# Altium PCB Relia_6_Layer.PcbDoc (part 2 of 2)
Units mm, origin at the board's own origin, x right, y up, seen from the top; angles counter-clockwise.
Board outline 40 x 40 mm, 6 copper layers (Top Layer, GND1, POWER1, POWER2, GND2, Bottom Layer), stack 0.816 mm thick; 143 components, 99 nets, 541 pads, 0 vias.
Unrouted connection lines stored in the file: 382.
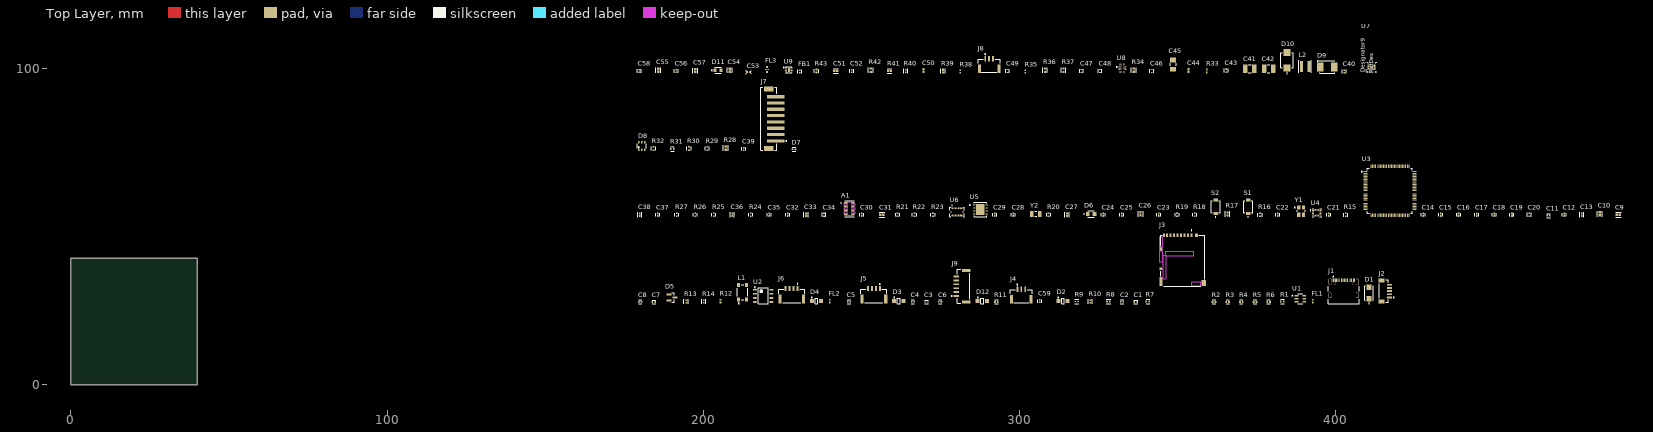
[diagram p0: Top Layer view]

## Part data (continued)
R40: library part CMP-04015-106274-1, "51.1kΩ ±1% 0.1W Chip Resistor 0402 Thick Film AEC-Q200 Qualified", Case Code (Imperial)=0402, Case Code (Metric)=1005, Max Operating Temperature=155°C, Min Operating Temperature=-55°C, Package Quantity=10000, Power Rating=63mW, Resistance=51.1kR, Resistor Type="Thick Film", Temperature Coefficient=100ppm/°C, Tolerance=1%, Voltage Rating=50V, Case/Package=0402, Construction=Rectangular, Depth=0.5mm, Height=0.35mm, Lead Free="Contains Lead", Length=1mm, Military Standard=Not, Packaging="Tape and Reel", RoHS Compliant=No, Series=RK73H, Termination=SMD/SMT, Voltage Rating (DC)=50V, Width=0.5mm
S1 S2: "Tactile Switch SPST-NO Top Actuated Surface Mount", Package=None, Availability=Unavailable, MP=TL1015AF160QG, Price=None
U1: "17V Clamp 5A (8/20Âµs) Ipp Tvs Diode Surface Mount SOT-23-6", Package="SOT-23-6 STMicroelectronics", Availability="In Stock", Check_prices=https://www.snapeda.com/parts/USBLC6-2SC6/STMicroelectronics/view-part/?ref=eda, MF=STMicroelectronics, MP=USBLC6-2SC6, Price=None, Purchase-URL=https://pricing.snapeda.com/search/part/USBLC6-2SC6/?ref=eda, SnapEDA_Link=https://www.snapeda.com/parts/USBLC6-2SC6/STMicroelectronics/view-part/?ref=snap
U2: library part CMP-2000-07245-1, "High-Speed CAN Transceiver, 3 to 5 V, 8-Pin SOIC (SOT96-1), RoHS, Tape and Reel", Manufacturer=NXP, Operating Supply Voltage (Max)=5.5V, Operating Supply Voltage (Min)=4.5V, Operating Supply Voltage (Typ)=5V, Operating Temperature (Max)=125C, Operating Temperature (Min)=-40C, Operating Temperature Classification=Automotive, Package Description="8-Pin Small Outline Integrated Circuit, Body 4.9 x 3.9 mm, Pitch 1.27 mm", Package Reference=SOT96-1, Package Type=SO, Power Down Mode=Normal/Silent, Supply Current=70mA, Category=Transceiver, Data Rate=1Mbps, Datasheet URL=http://www.nxp.com/documents/data_sheet/TJA1051.pdf, Datasheet Version="Rev. 7, 01/2015", DELETED=Compliant, Manufacturer URL=http://www.nxp.com/, Mounting=SurfaceMount, Mounting Technology=SurfaceMount, Number of Transceivers=1, Packaging=TapeandReel, Pin Count=8, Rad Hardened=No, Standard Supported=ISO11898-2
U3: library part CMP-12105-000050-1, "IC MCU 32BIT 2MB FLASH 100LQFP", Ambient Temperature Range High=+85°C, Ambient Temperature Range Low=-40°C, Frequency=480MHz, Manufacturer=STMicroelectronics, Max Junction Temp=+125°C, Max Supply Voltage=3.6V, Min Supply Voltage=1.71V, Package=LQFP100-1L, Temperature="-40°C to +125°C", Automotive=No, Category=IC, ComponentLink2Description=Datasheet, ComponentLink2URL=https://www.st.com/resource/en/datasheet/stm32h743vi.pdf, Core Architecture="Arm Cortex-M7", Data Bus Width=32bits, Device Class L1="Integrated Circuits (ICs)", Device Class L2="Embedded Processors and Controllers", Device Class L3=Microcontrollers, Digikey Description="IC MCU 32BIT 2MB FLASH 100LQFP", Height=1.6mm, Interface=I2C,SPI,UART,USART,USB,LIN,IrDA,Ethernet,I2S,Other, Ipc Land Pattern Name=QFP50P1600X1600X160-100, Lead Free=Yes, Manufacturer Part Number=STM32H743VIT6, Memory Size=2MBytes, Memory Type=FLASH, Number Of A/D Converters=3, Number Of Adc Channels=36, Number Of Cores=1, Number Of Ethernet Channels=1, Number Of I2C Channels=4, Number Of I/Os=82, Number Of Pwm Channels=42, Number Of Spi Channels=6, Number Of Timers/Counters=20, Number Of Uart Channels=9, Number Of Usb Channels=2, Octopart=https://octopart.com/stm32h743vit6-stmicroelectronics-76372527, Ram Size=1060KBytes, RoHS=TRUE, Standoff Height=0.05mm, Temperature Range High=+125°C, Temperature Range Low=-40°C
U4: "Accelerometer, Gyroscope, 6 Axis Sensor Output", Package=None, Availability=Unavailable, MP=ICM-42688-P, Price=None
U5: "FRAM (Ferroelectric RAM) Memory IC 256Kb (32K x 8) SPI 40 MHz 8-DFN (4x4.5)", Package="TDFN-8 Cypress Semiconductor", Check_prices=https://www.snapeda.com/parts/FM25V02A-DG/Infineon/view-part/?ref=eda, MF="Cypress Semiconductor", MP=FM25V02A-DG, SnapEDA_Link=https://www.snapeda.com/parts/FM25V02A-DG/Infineon/view-part/?ref=snap
U6: "High-performance 6-axis inertial sensor (accelerometer + gyroscope) <a href=\"https://pricing.snapeda.com/parts/BMI088/Bosch%20Sensortec/view-part?ref=eda\">Check prices</a>", Package=None, Availability=Unavailable, MP=BMI088, Price=None
U7: "SIMPLE SWITCHERÂ®, 36V 2.5A Synchronous Step-Down Converter 12-WSON -40 to 125", Manufacturer_Name="Texas Instruments", Copyright="Copyright (C) 2025 Ultra Librarian. All rights reserved.", Datasheet=https://www.ti.com/lit/gpn/lmr23625, Manufacturer_Part_Number=LMR23625CFPDRRR, RefDes=RefDes, TYPE=TYPE
U8: "2.7-V&nbsp;to 22-V, 56-mâ„", Package="VQFN-HR-12 Texas Instruments", Availability="In Stock", Check_prices=https://www.snapeda.com/parts/TPS2121RUXR/Texas+Instruments/view-part/?ref=eda, MF="Texas Instruments", MP=TPS2121RUXR, Price=None, Purchase-URL=https://pricing.snapeda.com/search?q=TPS2121RUXR&ref=eda, SnapEDA_Link=https://www.snapeda.com/parts/TPS2121RUXR/Texas+Instruments/view-part/?ref=snap
U9: library part CMP-06324-000082-1, "IC REG LINEAR 3.3V/3.3V 8TMLF", Dropout Voltage=120mV, Max Operating Temperature=125°C, Min Current Limit=350mA, Min Input Voltage=2.3V, Min Operating Temperature=-40°C, Output Current=300mA, Output Voltage=3.3V, Output Voltage Accuracy=1%, Package Quantity=1, Mount="Surface Mount", Number of Outputs=2, Number of Pins=8, Number of Regulators=2, Packaging="Tape and Reel", Polarity=Positive, RoHS Compliant=Yes, Series=-
Y1: library part SXT32412BB07-25.000MT, "25 MHz Â±30ppm Crystal 12pF 50 Ohms 4-SMD, No Lead", Package="NON STANDARD-4 Suntsu", Supplier Part Number 1=535-ABM8N-25.0000MHZ-12-B1U-T3CT-ND, Check_prices=https://www.snapeda.com/parts/SXT32412BB07-25.000M/Suntsu/view-part/?ref=eda, MF=Suntsu, MP=SXT32412BB07-25.000M, SnapEDA_Link=https://www.snapeda.com/parts/SXT32412BB07-25.000M/Suntsu/view-part/?ref=snap, Supplier 1=DigiKey
Y2: library part CMP-0447-00001-4, "Crystal 32.768kHz ±20ppm (Tol) 12.5pF FUND 70kΩ 2-Pin CSMD T/R", Case/Package=CSMD, ESR (Equivalent Series Resistance)=70kR, Frequency=32.768kHz, Frequency Tolerance=20ppm, Load Capacitance=12.5pF, Max Operating Temperature=85°C, Min Operating Temperature=-40°C, Operating Frequency="32.768 kHz", Package Quantity=3000, Depth=1.5mm, Height=0.9mm, Lead Free="Lead Free", Length=3.2mm, Number of Pins=2, Packaging="Tape and Reel", Radiation Hardening=No, REACH SVHC="No SVHC", RoHS Compliant=Yes, Series=ABS07, Series Resistance=70kR, Termination=SMD/SMT, Tolerance=20ppm, Width=1.5mm

## Nets (pads, with @x,y where several pads share a name; then routed paths per layer and width w, separated by ;. In a path a pad name is that pad's centre, name@x,y a point inside that pad or via, vN(x,y) a via of type N, cw(c..) or ccw(c..) an arc to the next point about the centre after c; other vN are vias at no path point)
+3V3_ANALOG: A1.1 A1.2 C11.1 C12.1 C13.1 C24.1 C25.1 C26.1 C27.1 C30.1 C31.1 C35.1 C36.1 C37.1 C38.1 C51.1 C52.1 FB1.2 R19.2 R24.1 R25.1 R26.2 R27.2 U3.20 U3.21 U4.5 U4.8 U6.3 U6.11
+3V3_MAIN: C7.1 C8.1 C14.1 C15.1 C16.1 C17.1 C18.1 C19.1 C20.1 C32.1 C33.1 C34.1 C55.1 C56.1 C57.1 J2.1 J3.4 R2.1 R3.1 R4.1 R5.1 R6.1 R8.2 R20.1 R21.2 R22.2 R23.2 R36.2 R37.2 R42.2 S1.1 U2.5 U3.6 U3.11 U3.27 U3.50 U3.75 U3.100 U5.8 U9.7
BEC_5V: C44.2 C45.1 C47.1 L2.2 R33.2 R35.2 U8.7 U8.7_1
BMI_CSB1: R27.1 U3.39 U6.14
BMI_CSB2: R26.1 U3.40 U6.5
BMI_INT(GYRO): U3.38 U6.12
CAN1_N: D5.2 L1.2 U2.6
CAN1_P: D5.1 L1.1 U2.7
CAN2_N: J5.3 L1.3 R12.1
CAN2_P: J5.2 L1.4 R12.2
CURR: J7.3 R28.1
GND: A1.3 A1.4 A1.5 C1.2 C2.2 C3.2 C4.2 C5.2 C6.2 C7.2 C8.2 C9.2 C10.2 C11.2 C12.2 C13.2 C14.2 C15.2 C16.2 C17.2 C18.2 C19.2 C20.2 C21.1 C22.1 C23.2 C24.2 C25.2 C26.2 C27.2 C28.1 C29.1 C30.2 C31.2 C32.2 C33.2 C34.2 C35.2 C36.2 C37.2 C38.2 C39.2 C41.1 C42.1 C43.2 C45.2 C46.1 C47.2 C48.2 C49.1 C50.1 C51.2 C52.2 C53.1 C54.2 C55.2 C56.2 C57.2 C58.2 C59.2 D2.2 D3.2 D4.2 D5.3 D6.1 D7.2 D8.2 D10.2 D11.1 D12.2 FL3.3 FL3.4 J1.1 J1.2 J1.3 J1.4 J1.A1-B12 J1.B1-A12 J2.5 J2.6 J2.7 J3.6 J3.P1 J3.P2 J3.P3 J3.P4 J3.SWA J4.3 J4.4 J4.5 J5.4 J5.5 J5.6 J6.4 J6.5 J6.6 J7.2 J7.9 J7.10 J8.3 J8.4 J8.5 J9.4 J9.7 J9.8 R9.2 R10.2 R18.1 R34.1 R39.2 R40.2 R41.2 S2.2 U1.2 U2.2 U2.8 U3.10 U3.19 U3.26 U3.49 U3.74 U3.99 U4.6 U4.7 U5.4 U5.9 U6.2 U6.4 U6.6 U6.7 U7.7 U7.12 U7.13 U8.3 U8.6 U8.12 U9.2 U9.9
GPS_SCL: J9.6 R13.2 U3.95
GPS_SDA: J9.5 R14.2 U3.96
ICM42INT: U3.37 U4.4
MCU_STATUS: R17.2 U3.84
NetC9_1: C9.1 U3.48
NetC10_1: C10.1 U3.73
NetC21_2: C21.2 U3.12 Y1.3
NetC22_2: C22.2 U3.13 Y1.1
NetC28_2: C28.2 U3.8 Y2.1
NetC29_2: C29.2 U3.9 Y2.2
NetC39_1: C39.1 R28.2 U3.29
NetC40_1: C40.1 L2.1 U7.1 U7.2
NetC40_2: C40.2 U7.3
NetC41_2: C41.2 C42.2 C43.1 D9.1 U7.8 U7.9 U7.10
NetC44_1: C44.1 R33.1 R34.2 U7.5
NetC46_2: C46.2 U7.4
NetC50_2: C50.2 U8.11
NetC53_2: C53.2 C54.1 FL3.2 R43.1 U9.1 U9.4
NetC58_1: C58.1 U9.6
NetD1_1: D1.1 FL1.1
NetD1_2: D1.2 J1.A4-B9 J1.B4-A9
NetD6_2: D6.2 R17.1
NetD11_2: D11.2 R42.1
NetFB1_1: FB1.1 U9.8
NetFL2_1: FL2.1 J5.1
NetJ1_A5: J1.A5 R9.1
NetJ1_B5: J1.B5 R10.1
NetJ8_1: J8.1 R36.1 U3.59
NetJ8_2: J8.2 R37.1 U3.60
NetR11_1: R11.1 U3.87
NetR15_1: R15.1 U3.42
NetR16_1: R16.1 U3.52
NetR18_2: R18.2 S1.2 U3.94
NetR21_1: R21.1 U5.3
NetR23_1: R23.1 U5.7
NetR29_1: R29.1 U3.22
NetR30_1: R30.1 U3.23
NetR31_1: R31.1 U3.24
NetR32_1: R32.1 U3.25
NetR35_1: R35.1 R39.1 U8.5
NetR38_1: R38.1 R41.1 U8.4
NetR40_1: R40.1 U8.10
NetR43_2: R43.2 U9.5
NetU2_1: U2.1 U3.82
NetU2_4: U2.4 U3.81
NRST: C23.1 J2.4 R20.2 S2.1 U3.14
PWM1: D8.4 J7.5 R29.2
PWM2: D8.6 J7.6 R30.2
PWM3: D8.1 J7.7 R31.2
PWM4: D8.3 J7.8 R32.2
RX: D7.1 J7.4 U3.97
SCL: A1.8 R25.2 U3.46
SD_CLK: J3.5 U3.79
SD_CMD: J3.3 R6.2 U3.83
SD_D1: J3.8 R3.2 U3.65
SD_D2: J3.1 R4.2 U3.66
SD_D3: J3.2 R5.2 U3.78
SD_DETECT: J3.SWB R8.1 U3.7
SD_DO: J3.7 R2.2 U3.64
SDA: A1.7 R24.2 U3.47
SPI1_CS: R22.1 U3.28 U5.1
SPI1_MISO: U3.90 U5.2
SPI1_MOSI: U3.91 U5.5
SPI1_SCLK: U3.89 U5.6
SPI2_CS: R19.1 U3.51 U4.12
SPI2_MISO: U3.53 U4.1
SPI2_MOSI: U3.54 U4.14
SPI2_SCLK: R16.2 U4.13
SPI4_MISO: U3.43 U6.10 U6.15
SPI4_MOSI: U3.44 U6.9
SPI4_SCLK: R15.2 U6.8
SWCLK: J2.3 U3.76
SWDIO: J2.2 U3.72
UART3_RX: J9.2 U3.56
UART3_TX: J9.3 U3.55
USART1_RX: J6.3 U3.69
USART1_TX: J6.2 U3.68
USART2_RX: J4.2 R11.2
USB1_N: J1.A7 J1.B7 U1.1
USB1_P: J1.A6 J1.B6 U1.3
USB4_N: R1.1 U1.6
USB4_P: R7.1 U1.4
USB_N: R1.2 U3.70
USB_P: R7.2 U3.71
VBAT: D9.2 D10.1 J7.1
VBUS: C1.1 C2.1 C48.1 FL1.2 R38.2 U1.5 U8.2 U8.2_1
VDD_5V: C3.1 C4.1 C5.1 C6.1 C49.2 C59.1 D2.1 D3.1 D4.1 D12.1 FL2.2 FL3.1 J4.1 J6.1 J9.1 R13.1 R14.1 U2.3 U8.1 U8.1_1 U8.8 U8.8_1
pads on no net: A1.6 D8.5 J1. J1.A8 J1.B8 U3.1 U3.2 U3.3 U3.4 U3.5 U3.15 U3.16 U3.17 U3.18 U3.30 U3.31 U3.32 U3.33 U3.34 U3.35 U3.36 U3.41 U3.45 U3.57 U3.58 U3.61 U3.62 U3.63 U3.67 U3.77 U3.80 U3.85 U3.86 U3.88 U3.92 U3.93 U3.98 U4.2 U4.3 U4.9 U4.10 U4.11 U6.1 U6.13 U6.16 U7.6 U7.11 U7.V U8.9 U9.3 Y1.2 Y1.4

## Polygon pours and split planes (outlines as drawn)
GND on GND1 (split plane): 39.49,0.51 0.51,0.51 0.51,39.49 39.49,39.49
+3V3_ANALOG on POWER1 (split plane): 39.49,0.51 0.51,0.51 0.51,39.49 39.49,39.49
+3V3_MAIN on POWER2 (split plane): 39.49,0.51 0.51,0.51 0.51,39.49 39.49,39.49
GND on GND2 (split plane): 39.49,0.51 0.51,0.51 0.51,39.49 39.49,39.49

## Text inside footprints (layer, text, board x,y; h text height)
J3: Mechanical 13 "PCB Edge" at 349.295,30.123 h0.61
U7: Top Overlay "Designator9" at 409.219,98.755 h1.27 r90; Top Overlay "RefDes" at 411.988,98.425 h1.27 r90